# Altium PCB PCB2.PcbDoc
Units mm, origin at the board's own origin, x right, y up, seen from the top; angles counter-clockwise.
Board outline 110.5 x 68.75 mm, 2 copper layers (Top Layer, Bottom Layer); 24 components, 16 nets, 103 pads, 12 vias.
Unrouted connection lines stored in the file: 1.
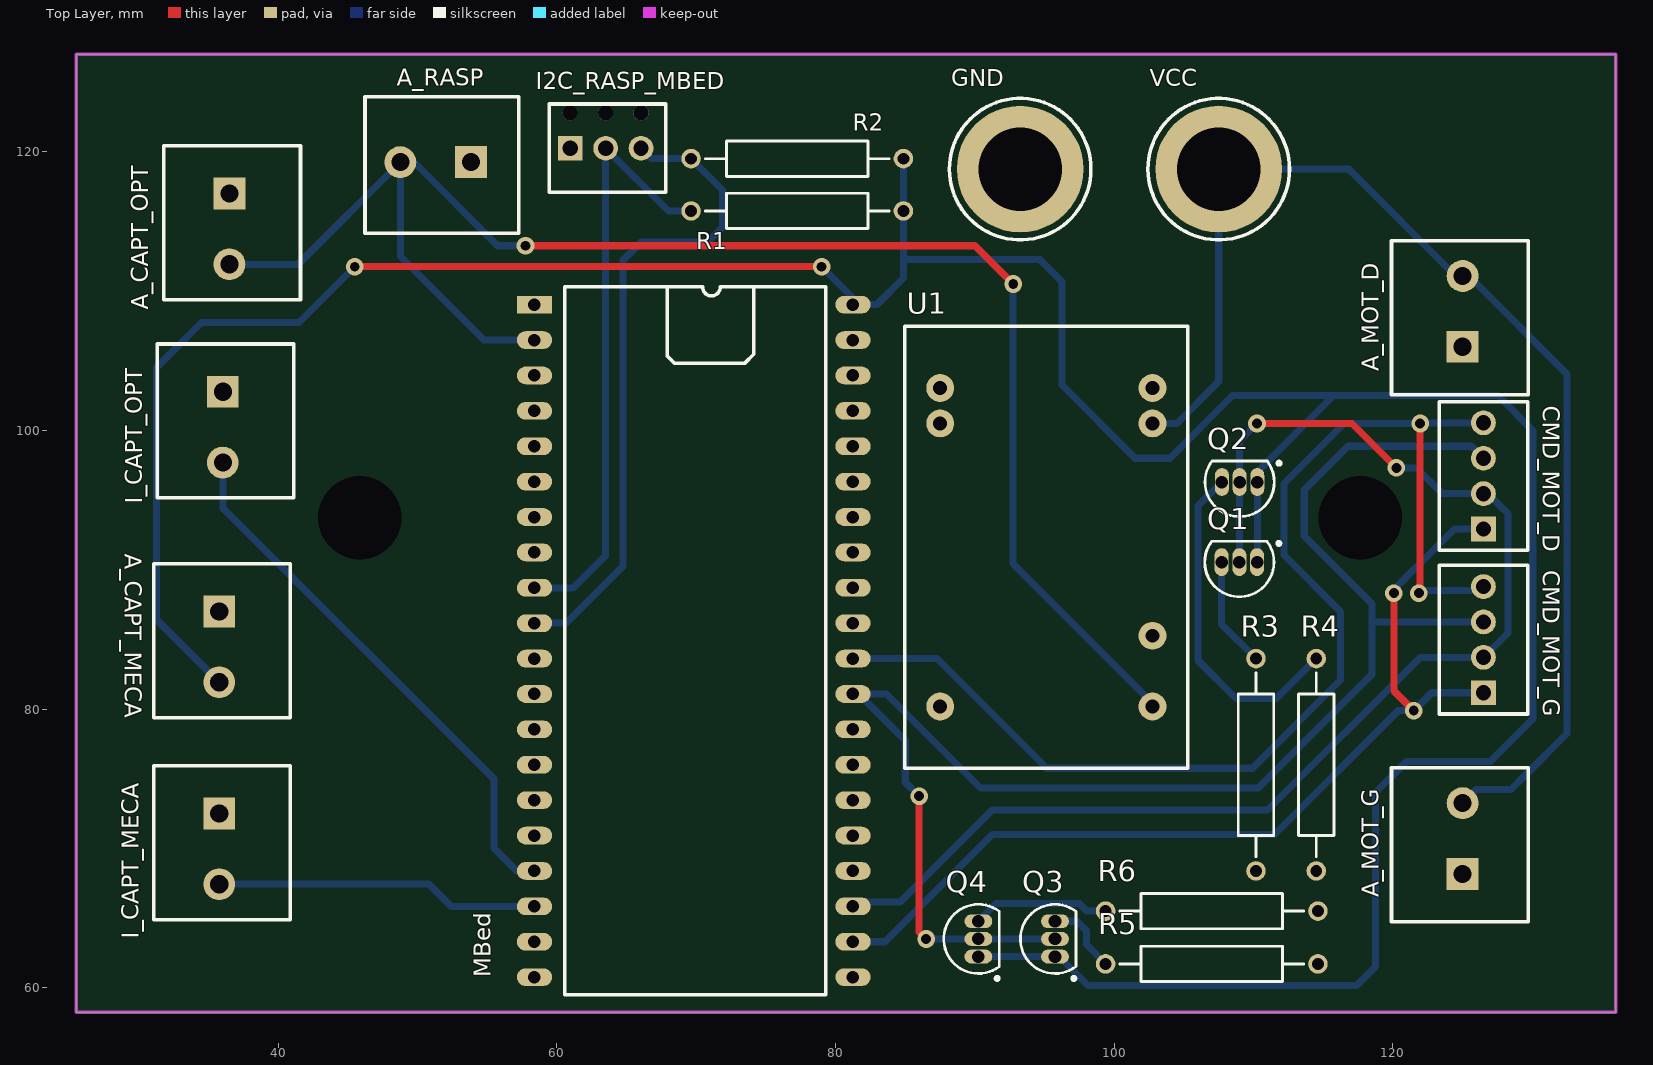
[diagram p0: Top Layer view]
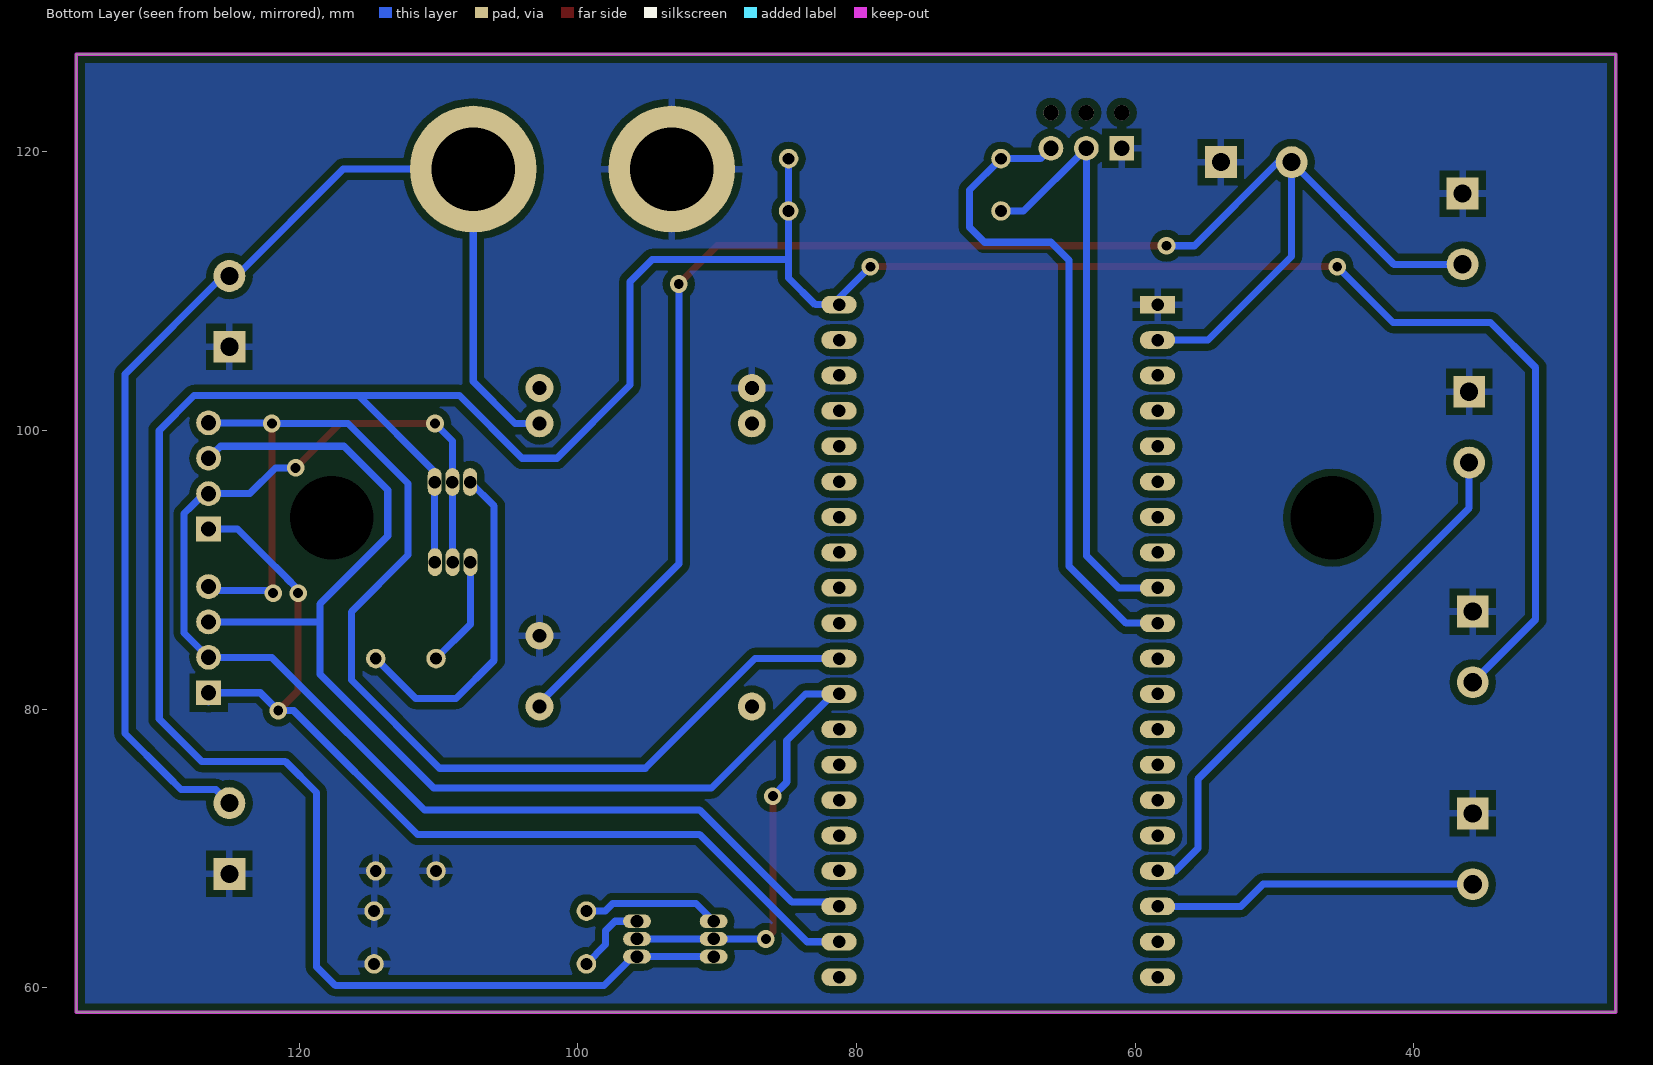
[diagram p1: Bottom Layer view, seen from below]

## Layer stack, top to bottom
Top Solder: solder mask 0.0102, Solder Resist, Dk 3.5
Top Layer: signal copper 0.0356
Dielectric 1: dielectric 0.32, FR-4, Dk 4.8
Bottom Layer: signal copper 0.0356
Bottom Solder: solder mask 0.0102, Solder Resist, Dk 3.5

## Board outline
25.5,58.25 28,58.25 136,58.25 136,127 25.5,127

## Design rules (kind name [scope] priority, off if disabled: settings)
Clearance [All] p1: gap=0.508 ignorepadtopadclearanceinfootprint=FALSE
HoleSize [All] p1: absolutevalues=TRUE maxlimit=10 minlimit=0.254 maxpercent=80.000 minpercent=20.000
PolygonConnect [All] p1: connectstyle=Relief reliefconductorwidth=0.508 reliefentries=4 polygonreliefangle="90 Angle" airgapwidth=0.508
RoutingVias [All] p1: holewidth=0.711 width=1.27 viastyle="Through Hole" minholewidth=0.508 minwidth=1.27 maxholewidth=0.711 maxwidth=1.27
SilkToSolderMaskClearance [IsPad] p1: minsilkscreentomaskgap=0.1 clearancetoexposedcopper=TRUE
SolderMaskExpansion [All] p1: expansion=0.102
Width [All] p1: maxlimit=2 minlimit=0.254 preferedwidth=0.508 minimp=50.000000 maximp=50.000000 favimp=50.000000
28 further rules are at their usual default settings.

## Components (designator, comment, footprint, x,y, rotation, side; value= is the part's Value field where it differs from the comment)
A_CAPT_MECA "Screw Terminal 2/5.08" KF301_2/5.08 35.77,87 r270 top
A_CAPT_OPT "Screw Terminal 2/5.08" KF301_2/5.08 36.5,117 r270 top
A_MOT_D "Screw Terminal 2/5.08" KF301_2/5.08 125,106 r90 top
A_MOT_G "Screw Terminal 2/5.08" KF301_2/5.08 125,68.17 r90 top
A_RASP "Screw Terminal 2/5.08" KF301_2/5.08 53.848,119.253 r180 top
CMD_MOT_D "Screw Terminal 4/2.54" MPT_0.5-4-2.54 126.5,92.92 r90 top
CMD_MOT_G "Screw Terminal 4/2.54" MPT_0.5-4-2.54 126.5,81.17 r90 top
GND "BANANE" connecteur_banane_v0.1 93.25,118.75 r0 top
I2C_RASP_MBED "Screw Terminal 3/2.54" MPT_0.5-3-2.54 60.96,120.25 r0 top
I_CAPT_MECA "Screw Terminal 2/5.08" KF301_2/5.08 35.77,72.509 r270 top
I_CAPT_OPT "Screw Terminal 2/5.08" KF301_2/5.08 36.024,102.771 r270 top
MBed "mbed LPC1768" DIP40-LARGE 58.39,109.022 r0 top (schematic designator MBed?)
Q1 "2N3906" TO-92A 108.98,90.542 r90 top
Q2 "2N3906" TO-92A 109,96.293 r90 top
Q3 "2N3906" TO-92A 95.75,63.5 r0 top
Q4 "2N3906" TO-92A 90.25,63.5 r0 top
R1 "Resistor" AXIAL-0.6 77.25,115.75 r180 top value=1K
R2 "Resistor" AXIAL-0.6 77.25,119.5 r0 top value=1K
R3 "Resistor" AXIAL-0.6 110.175,76 r90 top value=1K
R4 "Resistor" AXIAL-0.6 114.5,76 r90 top value=1K
R5 "Resistor" AXIAL-0.6 107,61.71 r0 top value=1K
R6 "Resistor" AXIAL-0.6 107,65.5 r180 top value=1K
U1 "jcj1012s05" jcj1012s05 84.97,107.485 r270 top (schematic designator U?)
VCC "BANANE" connecteur_banane_v0.1 107.5,118.75 r0 top

## Footprints (in the part's own frame and the unit in brackets; to place one, negate y for a bottom-side part, rotate by r counter-clockwise, add the part's x,y. Pads: shape width x height; smd on the part's side, far side on the other; paste and mask are expansions set on the pad)
AXIAL-0.6 [mm] "Axial Device, Thru-Hole; 2 Leads; 0.6 in Pin Spacing"
  round 1.4 hole 0.85: 1(-7.62,0) 2(7.62,0)
  silkscreen extent -6.6,-1.27 6.6,1.27
connecteur_banane_v0.1 [mm]
  round 9.1 hole 6: 1(0,0)
  silkscreen extent -5.08,-5.08 5.08,5.08, body extent -5,-5 5,5, height 10
DIP40-LARGE [mm]
  rect 2.54x1.27 hole 0.9: 1(0,0)
  oval 2.54x1.27 hole 0.9: 2(0,-2.54) 3(0,-5.08) 4(0,-7.62) 5(0,-10.16) 6(0,-12.7) 7(0,-15.24) 8(0,-17.78) 9(0,-20.32) 10(0,-22.86) 11(0,-25.4) 12(0,-27.94) 13(0,-30.48) 14(0,-33.02) 15(0,-35.56) 16(0,-38.1) 17(0,-40.64) 18(0,-43.18) 19(0,-45.72) 20(0,-48.26) 21(22.86,-48.26) 22(22.86,-45.72) 23(22.86,-43.18) 24(22.86,-40.64) 25(22.86,-38.1) 26(22.86,-35.56) 27(22.86,-33.02) 28(22.86,-30.48) 29(22.86,-27.94) 30(22.86,-25.4) 31(22.86,-22.86) 32(22.86,-20.32) 33(22.86,-17.78) 34(22.86,-15.24) 35(22.86,-12.7) 36(22.86,-10.16) 37(22.86,-7.62) 38(22.86,-5.08) 39(22.86,-2.54) 40(22.86,0)
  silkscreen extent 2.16,-49.53 20.9,1.27, body extent -1.65,-49.5 24.87,1.3, height 10.92
jcj1012s05 [mm]
  round 2 hole 1: 2(4.445,2.54) 3(6.985,2.54) 11(27.305,2.54) 14(27.305,17.78) 16(22.225,17.78) 22(6.985,17.78) 23(4.445,17.78)
  silkscreen extent 0,0 31.75,20.32
KF301_2/5.08 [mil]
  rect 90x90 hole 51.18: 0(0,0)
  round 90 hole 51.18: 1(200,0)
  silkscreen extent -135,-185 300,201, body extent -135,-185 295,201, height 559
MPT_0.5-3-2.54 [mm]
  rect 1.778x1.778 hole 1.1: 0(0,0)
  round 1.778 hole 1.1: 1(2.54,0) 2(5.08,0)
  round 1.1 hole 1.1: 9(0,2.54) 10(2.54,2.54) 11(5.08,2.54)
  silkscreen extent -1.52,-3.17 6.86,3.17, body extent -1.5,-3.15 6.58,3.05, height 8.5
MPT_0.5-4-2.54 [mil]
  rect 70x70 hole 43.31: 0(0,0)
  round 70 hole 43.31: 1(100,0) 2(200,0) 3(300,0)
  silkscreen extent -60,-125 360,125, body extent -59,-124 359,120, height 335
TO-92A [mm] "TO, Flat Index; 3 In-Line, Axial Leads; Body Dia. 4.5mm; Leads 0.51 x 0.48 mm (max)"
  oval 2x1 hole 0.9: 1(0,-1.27) 2(0,0) 3(0,1.27)
  silkscreen extent -2.48,-2.96 1.5,2.48, body extent -2.48,-2.5 1.5,2.5, height 6.86

## Part data
A_CAPT_MECA A_CAPT_OPT A_MOT_D A_MOT_G A_RASP I_CAPT_MECA I_CAPT_OPT: "KF301 2 contacts / 5.08mm", Supplier Part Number 1=3041529, Supplier 1=Farnell
CMD_MOT_D CMD_MOT_G: "MPT 0.5/ 4 contacts / 2.54mm", Supplier Part Number 1=3041414, Supplier 1=Farnell
GND VCC: library part "Socket 4 mm", "socket 4 mm with nut", Supplier Part Number 1=1176428, Supplier 1=Farnell
I2C_RASP_MBED: "MPT 0.5/ 3 contacts / 2.54mm", Supplier Part Number 1=3041360, Supplier 1=Farnell
MBed: "Prototyping Board", Supplier Part Number 1=1761179, Supplier 1=Farnell, Supplier 2=RS-Components, Supplier Part Number 2=769-4182
Q1 Q2 Q3 Q4: "PNP General Purpose Amplifier", ComponentLink1Description="Manufacturer Link", ComponentLink1URL=http://www.fairchildsemi.com/, ComponentLink2Description=Datasheet, ComponentLink2URL=http://www.fairchildsemi.com/ds/2N%2F2N3906.pdf, DatasheetVersion=1997, LatestRevisionDate=15-Jan-2003, LatestRevisionNote="PCB Footprint 'BCY-W3/D4.7' replaced", PackageDescription="TO, Flat Index; 3 In-Line, Axial Leads; Body Dia. 4.5mm; Leads 0.51 x 0.48 mm (max)", PackageReference=TO-92A, PackageVersion=Sep-1998, Published=8-Jun-2000, Publisher="Altium Limited"
R1 R2 R3 R4 R5 R6: LatestRevisionDate=29-May-2009, LatestRevisionNote="IPC-7351 Footprint Added.", PackageDescription="Chip Resistor", PackageReference=J1-0603, Published=8-Jun-2000, Publisher="Altium Limited"

## Free pads (board coordinates)
  round 1.524 hole 6: 1(45.847,93.726) 2(117.647,93.726)

## Via types
v1: diameter 1.27, hole 0.711, Top Layer to Bottom Layer, 8 vias
v2: diameter 1.27, hole 0.7, Top Layer to Bottom Layer, 4 vias

## Nets (pads, with @x,y where several pads share a name; then routed paths per layer and width w, separated by ;. In a path a pad name is that pad's centre, name@x,y a point inside that pad or via, vN(x,y) a via of type N, cw(c..) or ccw(c..) an arc to the next point about the centre after c; other vN are vias at no path point)
3V3: A_CAPT_MECA.1 MBed.40 Q1.1 Q2.1 Q3.1 Q4.1 R1.1 R2.2 | length 241
  Top Layer w0.508: v2(45.5,111.75) v2(79,111.75)
  Bottom Layer w0.508: A_CAPT_MECA.1 31.25,86.44 31.25,104.5 34.5,107.75 41.5,107.75 v2(45.5,111.75) ; v2(79,111.75) 81.25,109.5 MBed.40 82.952,109.022 84.87,110.94 84.87,112.25 ; R2.2 R1.1 84.87,112.25 ; Q4.1 Q3.1 96.043,62.23 98.122,60.152 117.402,60.152 118.75,61.5 118.75,74 121,76.25 127,76.25 130.04,79.29 130.04,100 127.54,102.5 115.75,102.5 ; Q1.1 110.27,90.562 Q2.1 110.27,97.02 115.75,102.5 ; 84.87,112.25 94.67,112.25 96.25,110.67 96.25,103.25 101.5,98 104,98 108.5,102.5 115.75,102.5
5V: A_CAPT_OPT.1 A_RASP.1 MBed.2 U1.14 | length 116.2
  Top Layer w0.254: A_RASP.1@48.514,118.999 A_RASP.1
  Top Layer w0.508: v2@58,113.25 90,113.25 v2(92.75,110.5)
  Bottom Layer w0.508: A_CAPT_OPT.1@36.42,111.92 A_CAPT_OPT.1 41.435,111.92 A_RASP.1 49.747,119.253 55.75,113.25 v2(57.75,113.25) ; A_RASP.1@48.768,118.879 48.768,112.482 54.768,106.482 MBed.2 ; v2(92.75,110.5) 92.75,90.409 U1.14@102.979,80.18
15V: A_MOT_D.1 A_MOT_G.1 U1.22 VCC.1 | length 87
  Bottom Layer w0.508: U1.22@102.979,100.5 104.5,100.5 107.5,103.5 VCC.1 116.83,118.75 A_MOT_D.1@124.5,111.08 ; A_MOT_G.1 125.984,74.234 128.484,74.234 129.5,75.25 ; A_MOT_D.1 125.45,111.08 132.5,104.03 132.5,78.25 129.5,75.25
DATA: CMD_MOT_D.3 CMD_MOT_G.3 MBed.30 | length 89.9
  Top Layer w0.508: v1(121.86,88.316) 121.75,88.427 121.96,88.637 v1(121.96,100.5)
  Bottom Layer w0.508: MBed.30 87.289,83.622 95.133,75.777 95.133,75.75 109.925,75.75 116.25,82.075 116.25,86.98 112.183,91.047 112.183,96.183 116.5,100.5 v1(121.96,100.5) 122.067,100.5 122.107,100.54 CMD_MOT_D.3 ; v1@121.86,88.5 126.21,88.5 CMD_MOT_G.3
DATA_CAPT_MECA_3V3: I_CAPT_MECA.1 MBed.18 | length 24
  Bottom Layer w0.508: I_CAPT_MECA.1@36.27,66.929 I_CAPT_MECA.1 50.821,67.429 52.408,65.842 MBed.18
DATA_CAPT_OPT_3V3: I_CAPT_OPT.1 MBed.17 | length 39.3
  Bottom Layer w0.508: I_CAPT_OPT.1 36.024,94.441 55.5,74.965 55.5,70 57.118,68.382 MBed.17
FREIN: CMD_MOT_D.0 CMD_MOT_G.0 MBed.22 | length 70.6
  Top Layer w0.508: v1(120.066,88.316) 120.066,81.317 v1(121.5,79.883)
  Bottom Layer w0.508: MBed.22 83.552,63.302 91.25,71 111.5,71 120.383,79.883 v1(121.5,79.883) 122.787,81.17 125.83,81.17 126.5,80.5 CMD_MOT_G.0 ; v1@120.25,88.75 120.853,89.353 120.853,89.369 121.671,90.187 121.687,90.187 124.42,92.92 CMD_MOT_D.0
GND: A_CAPT_MECA.0 A_CAPT_OPT.0 A_MOT_D.0 A_MOT_G.0 A_RASP.0 GND.1 I2C_RASP_MBED.0 I_CAPT_MECA.0 I_CAPT_OPT.0 MBed.1 R3.1 R4.1 R5.2 R6.1 U1.2 U1.16
NetQ1_3: Q1.3 R3.2 | length 7.9
  Bottom Layer w0.508: Q1.3 107.71,86.085 R3.2
NetQ2_3: Q2.3 R4.2 | length 24.3
  Bottom Layer w0.508: Q2.3 106,94.563 106,83.5 108.75,80.75 111.63,80.75 R4.2
NetQ3_3: Q3.3 R5.1 | length 5.5
  Bottom Layer w0.508: Q3.3 97.316,64.77 98,64.086 98,63.09 R5.1
NetQ4_3: Q4.3 R6.2 | length 9.9
  Bottom Layer w0.508: Q4.3 91.512,66.032 97.491,66.032 98.023,65.5 R6.2
PWM: CMD_MOT_D.1 CMD_MOT_G.1 MBed.23 Q1.2 Q2.2 | length 94.9
  Top Layer w0.508: v1(110.25,100.5) 117.059,100.5 v1(120.25,97.309)
  Bottom Layer w0.508: MBed.23 81.548,66.14 84.64,66.14 91.25,72.75 111,72.75 121.96,83.71 CMD_MOT_G.1 128.25,85.46 128.25,94.026 127.705,94.571 127.206,95.07 126.89,95.07 CMD_MOT_D.1 123.54,95.46 121.691,97.309 v1(120.25,97.309) ; Q1.2 108.988,90.55 108.988,91.564 109,91.576 Q2.2 109,99.25 v1(110.25,100.5)
SCLK: I2C_RASP_MBED.2 MBed.10 R2.1 | length 47.9
  Bottom Layer w0.508: MBed.10 60.663,86.162 64.75,90.248 64.75,112.215 66.035,113.5 70.802,113.5 71.88,114.578 71.88,117.25 R2.1 66.79,119.5 I2C_RASP_MBED.2
SDA: I2C_RASP_MBED.1 MBed.9 R1.2 | length 43.3
  Bottom Layer w0.508: MBed.9 61.202,88.702 63.5,91 I2C_RASP_MBED.1 68,115.75 R1.2
SENS: CMD_MOT_D.2 CMD_MOT_G.2 MBed.29 Q3.2 Q4.2 | length 110
  Top Layer w0.508: v1(86,73.75) 86,64 v1(86.5,63.5)
  Bottom Layer w0.508: MBed.29 MBed.29@81.668,81.082 ; v1(86,73.75) 85,74.75 85,77.75 MBed.29@81.668,81.082 ; v1(86.5,63.5) Q4.2 Q3.2 ; CMD_MOT_G.2 118.5,86.25 ; CMD_MOT_D.2 125.638,98.862 116.778,98.862 113.638,95.722 113.638,92.414 118.5,87.553 118.5,86.25 ; MBed.29@81.668,81.082 83.668,81.082 90.414,74.336 110.336,74.336 118.5,82.5 118.5,86.25
pads on no net: I2C_RASP_MBED.9 I2C_RASP_MBED.10 I2C_RASP_MBED.11 MBed.3 MBed.4 MBed.5 MBed.6 MBed.7 MBed.8 MBed.11 MBed.12 MBed.13 MBed.14 MBed.15 MBed.16 MBed.19 MBed.20 MBed.21 MBed.24 MBed.25 MBed.26 MBed.27 MBed.28 MBed.31 MBed.32 MBed.33 MBed.34 MBed.35 MBed.36 MBed.37 MBed.38 MBed.39 U1.3 U1.11 U1.23

## Polygon pours and split planes (outlines as drawn)
GND on Bottom Layer "GND" (solid, remove dead copper, pour order 8): 25.5,127 136,127 136,58.25 25.5,58.25
no net on Bottom Layer "Bottom Layer-No Net" (solid, pour order 2): 25.75,126.875

## Keep-outs
Keep-Out Layer:
  the board outline again, w0.254